# Altium PCB PowerMeter.PcbDoc
Units mm, origin at the board's own origin, x right, y up, seen from the top; angles counter-clockwise.
Board outline 98.93 x 50.29 mm, 2 copper layers (Top Layer, Bottom Layer); 55 components, 37 nets, 172 pads, 0 vias.
Unrouted connection lines stored in the file: 2.
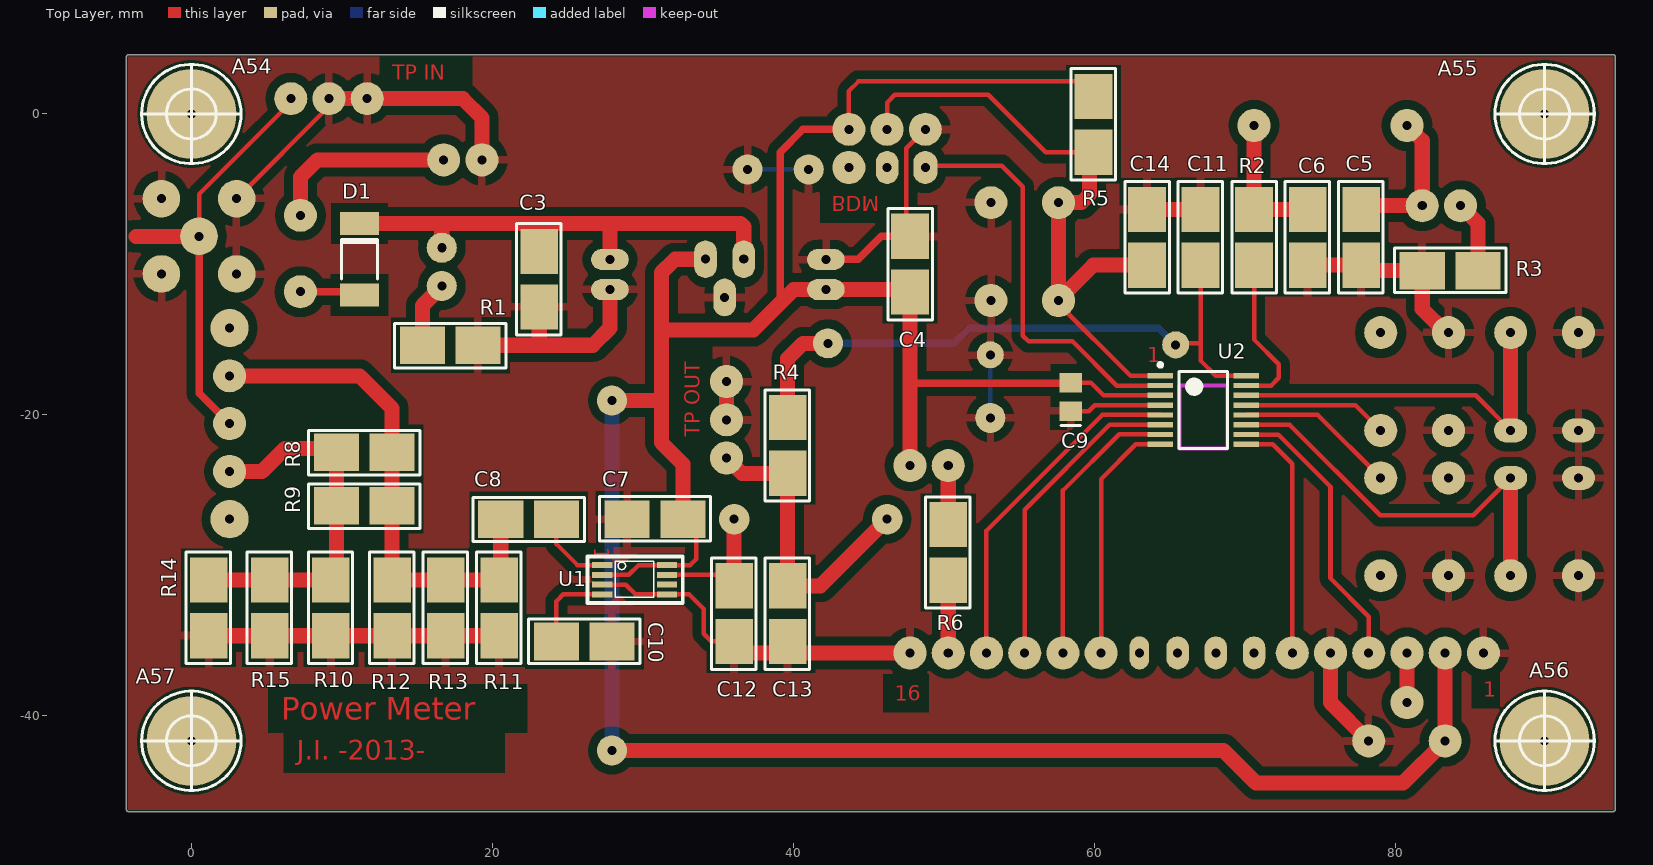
[diagram p0: Top Layer view]
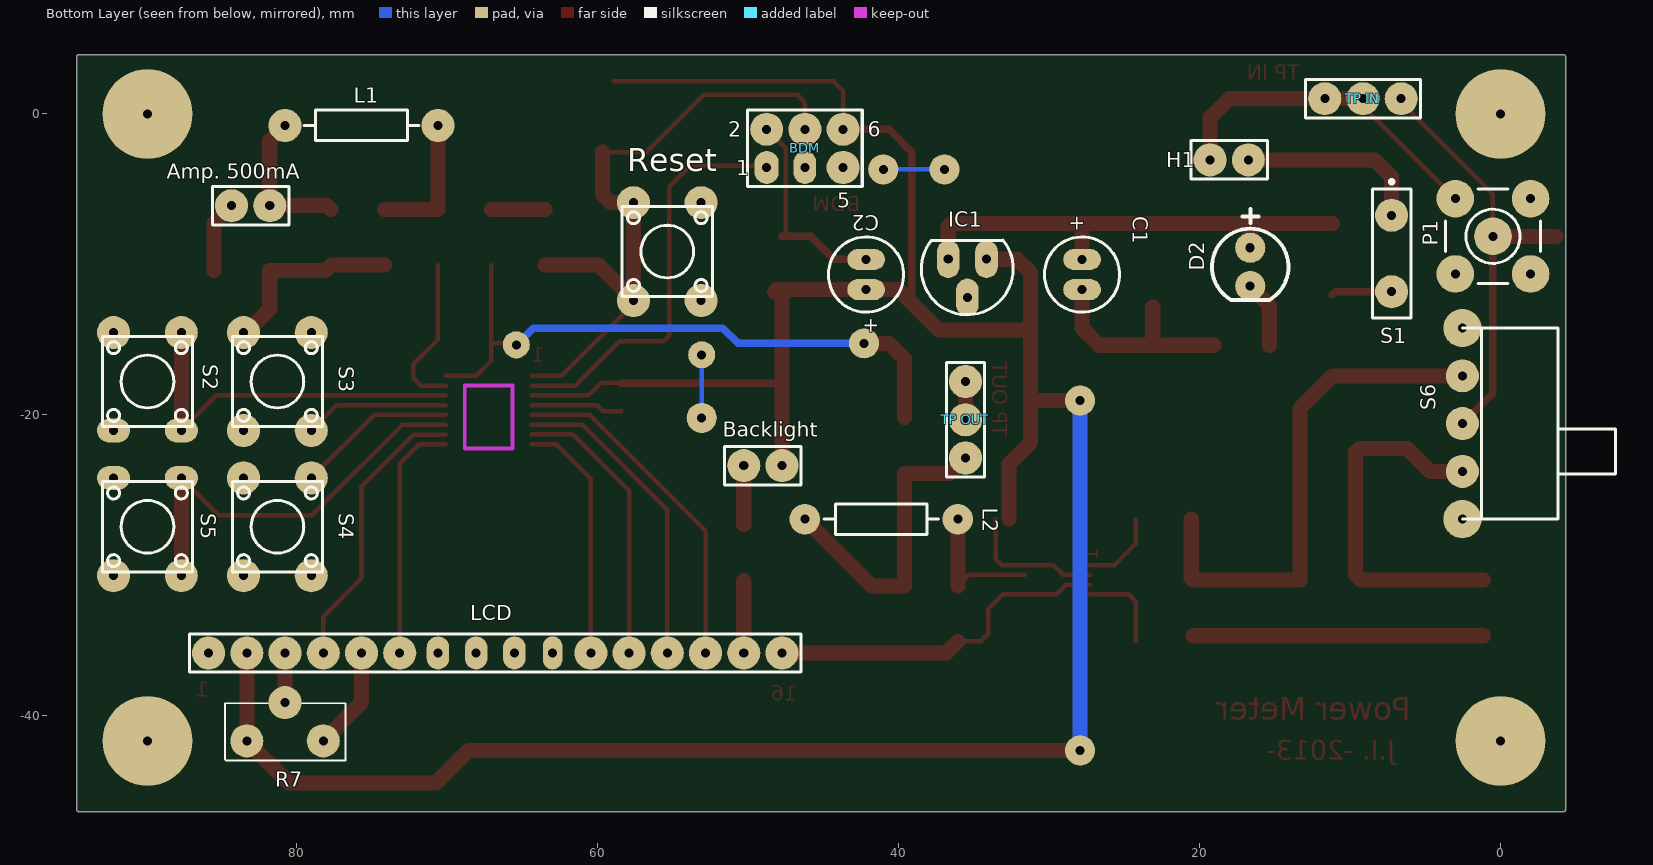
[diagram p1: Bottom Layer view, seen from below]
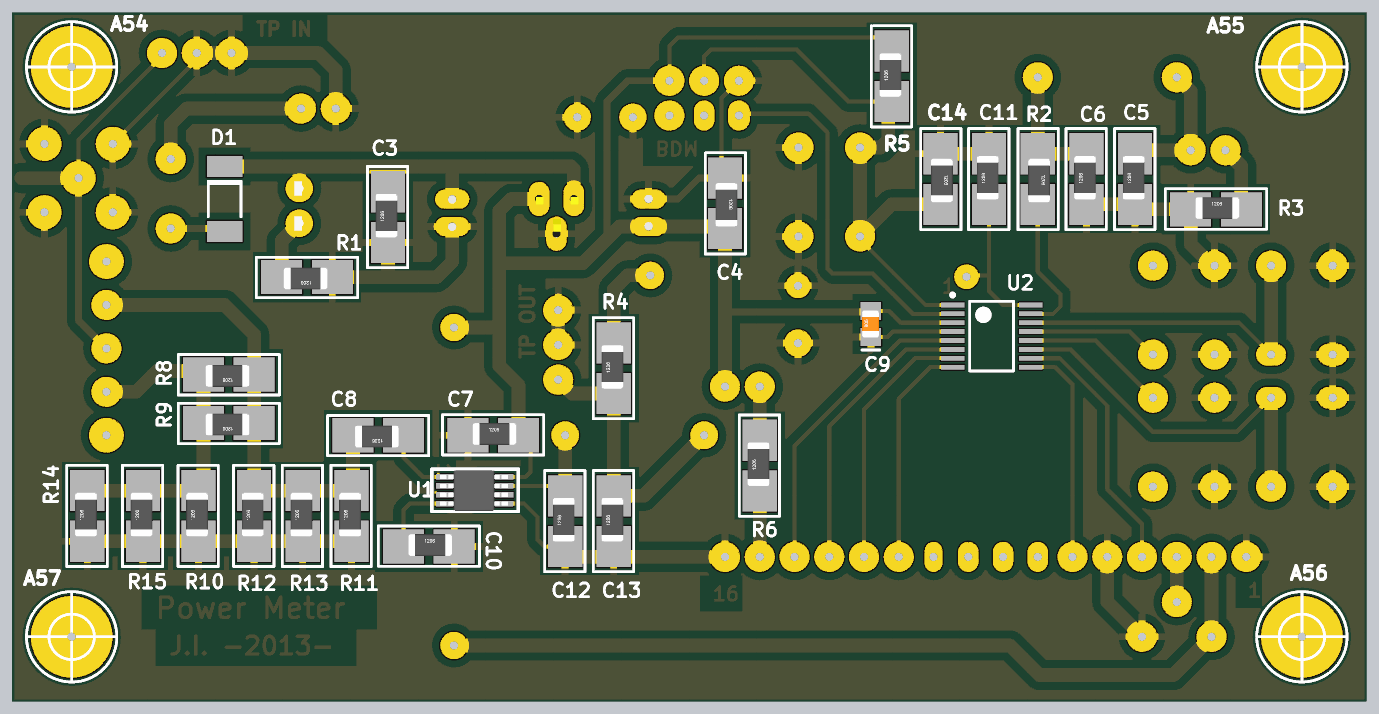
[diagram p2: 3D render of the assembled board from above, using the file's embedded part models]

## Layer stack, top to bottom
Top Solder: solder mask 0.0102, Solder Resist, Dk 3.5
Top Layer: signal copper 0.0356
Dielectric1: dielectric 0.32, FR-4, Dk 4.8
Bottom Layer: signal copper 0.0356
Bottom Solder: solder mask 0.0102, Solder Resist, Dk 3.5

## Board outline
-4.317,-46.209 cw(c-4.191,-46.19) -4.318,-46.19 -4.318,3.81 cw(c-4.191,3.81) -4.191,3.937 94.488,3.937 cw(c94.488,3.81) 94.615,3.81 94.615,-46.228 cw(c94.488,-46.228) 94.488,-46.355 -4.191,-46.355 cw(c-4.191,-46.228)

## Design rules (kind name [scope] priority, off if disabled: settings)
Clearance Clearance_2 [(InComponent('U1' )) Or (InComponent('U2'))] p1: gap=0.1
Clearance Clearance_1 [InNamedPolygon('PlanoGND')] p2: gap=0.6
Clearance [All] p3: gap=0.254
MinimumSolderMaskSliver [All] p1: minsoldermaskwidth=0.04
NetAntennae [Not (InNet('NetP1_1'))] p1: netantennaetolerance=0
PolygonConnect [All] p1: connectstyle=Relief reliefconductorwidth=0.5 reliefentries=4 polygonreliefangle="90 Angle" airgapwidth=0.254
RoomDefinition Micro [InComponentClass('Micro')] p1: confinementstyle=ConfineIn formatcopy=TRUE lockcomponents=FALSE outline 39.624,-44.45 93.726,-44.45 93.726,3.429 39.624,3.429
RoomDefinition Fuente [InComponentClass('Fuente')] p2: confinementstyle=ConfineIn formatcopy=TRUE lockcomponents=FALSE outline 5.588,-17.272 49.911,-17.272 49.911,-1.397 5.588,-1.397
RoomDefinition Detector [InComponentClass('Detector')] p3: confinementstyle=ConfineIn formatcopy=TRUE lockcomponents=FALSE outline -8.128,-37.973 48.514,-37.973 48.514,3.937 -8.128,3.937
RoutingVias [All] p1: holewidth=0.711 width=1.27 viastyle="Through Hole" minholewidth=0.711 minwidth=1.27 maxholewidth=0.711 maxwidth=1.27
SilkToSilkClearance [All] p1: silktosilkclearance=0.1
SilkToSolderMaskClearance SilkscreenOverComponentPads [IsPad] p1: minsilkscreentomaskgap=0 clearancetoexposedcopper=TRUE
SolderMaskExpansion [All] p1: expansion=0.102
UnRoutedNet UnRoutedNet_1 [Not((InNet('NetS2_1') OR InNet('NetS3_1') OR InNet('NetS4_1') OR InNet('NetS5_1')))] p1:
Width [All] p1: maxlimit=1 minlimit=0.3 preferedwidth=0.5
24 further rules are at their usual default settings.

## Classes and differential pairs
component class Micro: "Amp. 500mA" Backlight BDM C5 C6 C9 C11 C14 L1 LCD R2 R3 R5 R6 R7 Reset S2 S3 S4 S5 U2
component class Fuente: C1 C2 C3 C4 D1 D2 H1 IC1 R1 S1
component class Detector: C7 C8 C10 C12 C13 L2 P1 R4 R8 R9 R10 R11 R12 R13 R14 R15 S6 "TP IN" "TP OUT" U1
component class PowerMeter: "Amp. 500mA" Backlight BDM C1 C2 C3 C4 C5 C6 C7 C8 C9 C10 C11 C12 C13 C14 D1 D2 H1 IC1 L1 L2 LCD P1 R1 R2 R3 R4 R5 R6 R7 R8 R9 R10 R11 R12 R13 R14 R15 Reset S1 S2 S3 S4 S5 S6 "TP IN" "TP OUT" U1 U2

## Components (designator, comment, footprint, x,y, rotation, side; value= is the part's Value field where it differs from the comment)
A54 "Comment" "AGUJERO 1/8\"" 0,0 r0 top
A55 "Comment" "AGUJERO 1/8\"" 89.916,0 r0 top
A56 "Comment" "AGUJERO 1/8\"" 89.916,-41.656 r0 top
A57 "Comment" "AGUJERO 1/8\"" 0,-41.656 r0 top
"Amp. 500mA" "Header 2" HDR1X2 81.788,-6.096 r0 bottom
Backlight "Header 2" HDR1X2 47.752,-23.368 r0 bottom
BDM "BKDM_Conn." HDR2X3 48.768,-3.556 r180 bottom (schematic designator J1)
C1 "Cap Pol1" CAPPR2-5x11 27.813,-10.668 r270 bottom
C2 "Cap Pol1" CAPPR2-5x11 42.164,-10.668 r90 bottom
C3 "" "SMD generico" 23.114,-12.827 r90 top
C4 "" "SMD generico" 47.752,-8.128 r270 top
C5 "Capacitor" "SMD Generico" 77.724,-10.05 r90 top
C6 "Capacitor" "SMD Generico" 74.168,-10.05 r90 top
C7 "Capacitor" "SMD Generico" 28.956,-26.924 r0 top
C8 "Capacitor" "SMD Generico" 24.257,-26.924 r180 top
C9 "Capacitor" CAP-0805 58.42,-18.796 r90 top
C10 "Capacitor" "SMD Generico" 24.257,-35.052 r0 top
C11 "Capacitor" "SMD Generico" 67.056,-10.05 r90 top
C12 "Capacitor" "SMD Generico" 36.068,-35.052 r90 top
C13 "Capacitor" "SMD Generico" 39.624,-35.052 r90 top
C14 "Capacitor" "SMD Generico" 63.5,-6.35 r270 top
D1 "1N400X" MELF 11.176,-9.652 r90 top
D2 "LED Verde" LED 16.637,-8.89 r270 bottom
H1 "Header 2" HDR1X2 19.304,-3.048 r180 bottom
IC1 "78Lxx" "TO-92 (2)" 35.433,-9.652 r90 bottom
L1 "choke" axial-0.4 75.692,-0.762 r0 bottom
L2 "choke" AXIAL-0.4 41.148,-26.924 r0 bottom
LCD "Header 16" HDR1X16 85.852,-35.814 r180 bottom (schematic designator LED)
P1 "SMA" SMB_V-RJ45 0.508,-8.128 r180 bottom
R1 "" "SMD generico" 19.05,-15.367 r180 top
R2 "Resistor" "SMD generico" 70.612,-6.35 r270 top
R3 "Resistor" "smd generico" 81.788,-10.414 r0 top
R4 "Resistor" "SMD GENERICO" 39.624,-23.876 r90 top
R5 "Resistor" "smd generico" 59.944,-2.54 r90 top
R6 "Resistor" "SMD generico" 50.292,-30.988 r90 top
R7 "Potenciómetro" "TRIMMER-V (2)" 83.312,-41.656 r180 bottom
R8 "Resistor" "SMD generico" 13.335,-22.479 r180 top
R9 "Resistor" "SMD generico" 13.335,-26.035 r180 top
R10 "Resistor" "SMD generico" 9.271,-34.671 r90 top
R11 "Resistor" "SMD generico" 20.447,-34.671 r90 top
R12 "Resistor" "SMD generico" 13.335,-34.671 r90 top
R13 "Resistor" "SMD generico" 16.891,-34.671 r90 top
R14 "Resistor" "SMD generico" 1.143,-34.671 r90 top
R15 "Resistor" "SMD generico" 5.207,-34.671 r90 top
Reset "SW-DPST" SW-T-V-6x6#1 55.372,-9.144 r90 bottom
S1 "SW-SPST" SPST-2 7.239,-9.271 r270 bottom
S2 "SW-DPST" SW-T-V-6x6#2 89.916,-17.78 r270 bottom
S3 "SW-DPST" SW-T-V-6x6#1 81.28,-17.78 r270 bottom
S4 "SW-DPST" SW-T-V-6x6#1 81.28,-27.432 r270 bottom
S5 "SW-DPST" SW-T-V-6x6#3 89.916,-27.432 r270 bottom
S6 "SW-SPDT" SW-SPDT-H 2.54,-26.924 r90 bottom
"TP IN" "Header 3" HDR1X3 11.684,1.016 r180 bottom
"TP OUT" "Header 3" HDR1X3 35.56,-17.78 r270 bottom
U1 "MAX9933" "8L uMAX" 27.305,-29.972 r0 top
U2 "MC9S08SH8" TSSOP16 64.389,-17.399 r0 top

## Footprints (in the part's own frame and the unit in brackets; to place one, negate y for a bottom-side part, rotate by r counter-clockwise, add the part's x,y. Pads: shape width x height; smd on the part's side, far side on the other; paste and mask are expansions set on the pad)
"8L uMAX" [mm] "8 PIN SMD PACKAGE for MAX9933"
  rect 1.35x0.4 smd: 1(0,0) 2(0,-0.65) 3(0,-1.3) 4(0,-1.95) 5(4.3,-1.95) 6(4.3,-1.3) 7(4.3,-0.65) 8(4.3,0)
  silkscreen extent -0.97,-2.52 5.35,0.58, body extent -0.4,-2.47 4.6,0.53, height 0.95
"AGUJERO 1/8\"" [mil] "Agujero pasante para tornillo de 1/8\" de diámetro"
  round 235 hole 23.62: 1(0,0)
  silkscreen extent -130,-130 130,130
axial-0.4 [mm] "Componente de 2 pines axiales, Pitch: 400mil (10.16mm)"
  round 2.2 hole 0.6: 1(-5.08,0) 2(5.08,0)
  silkscreen extent -3.81,-1.02 3.81,1.02
AXIAL-0.4 [mil] "Componente de 2 pines axiales, Pitch: 400mil (10.16mm)"
  round 80 hole 23.62: 1(-200,0) 2(200,0)
  silkscreen extent -150,-40 150,40
CAP-0805 [mm] "Chip Capacitor; Body 2.0 x 1.2 mm (LxW typ)"
  rect 1.3x1.5 smd: 1(-0.95,0) 2(0.95,0)
  silkscreen extent -1.9,-0.65 -1.9,0.65, body extent -1,-0.6 1,0.65, height 0.78
CAPPR2-5x11 [mm] "Capacitor, Electrolytic, Radial; Body 5 x 11 mm (Dia.xH typ); Pin Spacing 2 mm (typ)"
  oval 1.4x2.5 hole 0.6: 1(-1,0) 2(1,0)
  silkscreen extent -2.5,-2.5 2.5,2.5, body extent -2.5,-2.53 2.55,2.53, height 11.53
HDR1X2 [mm] "Connector; Header; 2 Position"
  round 2.2 hole 0.6: 1(0,0) 2(2.54,0)
  silkscreen extent -1.27,-1.27 3.81,1.27
HDR1X3 [mm] "Connector; Header; 3 Position"
  round 2.2 hole 0.6: 1(0,0) 2(2.54,0) 3(5.08,0)
  silkscreen extent -1.27,-1.27 6.35,1.27
HDR1X16 [mm] "Connector; Header; 16 Position"
  round 2.2 hole 0.6: 1(0,0) 2(2.54,0) 3(5.08,0) 4(7.62,0) 5(10.16,0) 6(12.7,0) 11(25.4,0) 12(27.94,0) 13(30.48,0) 14(33.02,0) 15(35.56,0) 16(38.1,0)
  oval 1.5x2.2 hole 0.6: 7(15.24,0) 8(17.78,0) 9(20.32,0)
  oval 1.3x2.2 hole 0.6: 10(22.86,0)
  silkscreen extent -1.27,-1.27 39.37,1.27
HDR2X3 [mm] "Connector; Header; 3x2 Position"
  oval 1.6x2.2 hole 0.6: 1(0,0)
  round 2.2 hole 0.6: 2(0,2.54) 4(2.54,2.54) 5(5.08,0) 6(5.08,2.54)
  oval 1.5x2.2 hole 0.6: 3(2.54,0)
  silkscreen extent -1.27,-1.27 6.35,3.81
LED [mm]
  round 2 hole 0.6: 1(0,0) 2(2.54,0)
  silkscreen extent -2.59,-2.54 3.47,2.54, body extent -1.7,-2.91 3.72,3.11, height 8.81
MELF [mm] "Metal Electrode Face (MELF) Diode; Body 5 x 2.5 mm (LxDia)"
  rect 1.55x2.6 smd: 1(-2.375,0) 2(2.375,0)
  silkscreen extent -1.3,-1.2 1.3,1.2
SMB_V-RJ45 [mm] "Connector; SMB Straight"
  round 2.5 hole 0.6: 1(0,0) 2(-2.5,-2.5) 2(-2.5,2.5) 2(2.5,-2.5) 2(2.5,2.5)
  silkscreen extent -3.15,-3.15 3.15,3.15
"SMD generico" [mm] "SMD 0805-1206-1210"
  rect 3x2.5 smd: 1(0,0) 2(3.7,0)
  silkscreen extent -1.85,-1.45 5.55,1.5, body extent 0.35,-0.7 3.55,0.9, height 1
"SMD Generico" [mm] "SMD 0805-1206-1210"
  rect 3x2.5 smd: 1(0,0) 2(3.7,0)
  silkscreen extent -1.85,-1.45 5.55,1.5, body extent 0.35,-0.7 3.55,0.9, height 1
"smd generico" [mm] "SMD 0805-1206-1210"
  rect 3x2.5 smd: 1(0,0) 2(3.7,0)
  silkscreen extent -1.85,-1.45 5.55,1.5, body extent 0.35,-0.7 3.55,0.9, height 1
"SMD GENERICO" [mm] "SMD 0805-1206-1210"
  rect 3x2.5 smd: 1(0,0) 2(3.7,0)
  silkscreen extent -1.85,-1.45 5.55,1.5, body extent 0.35,-0.7 3.55,0.9, height 1
SPST-2 [mm] "Circuit Breaker; 2 Leads"
  round 2.2 hole 0.6: 1(-2.54,0) 2(2.54,0)
  silkscreen extent -4.89,-1.27 4.28,1.27
SW-SPDT-H [mm] "Interruptor un polo y dos posiciones para circuito impreso, posición horizontal, Pitch: 125mil (3.174mm)"
  round 2.54 hole 0.6: 0(0,0) 0(12.7,0)
  round 2.2 hole 0.6: 1(6.35,0) 2(9.525,0) 3(3.175,0)
  silkscreen extent 0,-10.16 12.7,0
SW-T-V-6x6#1 [mm] "Pulsador tactil vertical para circuito impreso, Dimensiones: 6 x 6 mm"
  round 2.2 hole 0.6: 1(-3.25,2.25) 1(3.25,2.25) 2(-3.25,-2.25) 2(3.25,-2.25)
  silkscreen extent -3,-3 3,3
SW-T-V-6x6#2 [mm] "Pulsador tactil vertical para circuito impreso, Dimensiones: 6 x 6 mm"
  round 2.2 hole 0.6: 1(-3.25,2.25) 2(-3.25,-2.25)
  oval 1.6x2.2 hole 0.6: 1(3.25,2.25) 2(3.25,-2.25)
  silkscreen extent -3,-3 3,3
SW-T-V-6x6#3 [mm] "Pulsador tactil vertical para circuito impreso, Dimensiones: 6 x 6 mm"
  oval 1.6x2.2 hole 0.6: 1(-3.25,2.25) 2(-3.25,-2.25)
  round 2.2 hole 0.6: 1(3.25,2.25) 2(3.25,-2.25)
  silkscreen extent -3,-3 3,3
"TO-92 (2)" [mm] "TO, 3 pines axiales en triangulo, Diametro del cuerpo: 180mil (4.58mm), Pitch: 50mil (1.27mm)"
  oval 2.5x1.5 hole 0.6 paste+0: 1(0,-1.27) 2(-2.54,0) 3(0,1.27)
  silkscreen extent -3.69,-3.04 1.27,3.06, body extent -2.8,-2.61 1.36,2.71, height 7.33
"TRIMMER-V (2)" [mm] "trimer vertical- 200 mils separación horizonal- 100 mils de separación vertical"
  round 2.2 hole 0.6: 1(0,0) 2(2.54,2.54) 3(5.08,0)
  silkscreen extent -1.45,-1.3 6.55,2.5
TSSOP16 [mm] "-"
  rect 1.7x0.35 smd: 1(0,0) 2(0,-0.65) 3(0,-1.3) 4(0,-1.95) 5(0,-2.6) 6(0,-3.25) 7(0,-3.9) 8(0,-4.55) 9(5.7,-4.55) 10(5.7,-3.9) 11(5.7,-3.25) 12(5.7,-2.6) 13(5.7,-1.95) 14(5.7,-1.3) 15(5.7,-0.65) 16(5.7,0)
  silkscreen extent -0.12,-4.82 4.45,0.85, body extent 0.6,-4.83 5.1,0.27, height 1.1

## Part data
"Amp. 500mA" Backlight H1: "Header, 2-Pin"
C1 C2: "Polarized Capacitor (Radial)"
C3 C4: library part Cap, "Capacitor"
C5 C6 C7 C8 C9 C10 C11 C12 C13 C14: "Capacitor no polarizado"
D1: library part Diode, "Default Diode"
D2: library part LED0, "Typical INFRARED GaAs LED"
IC1: "Regulador fijo de tensión positiva 100mA"
L1 L2: library part Inductor, "Inductor"
LCD: "Header, 16-Pin"
P1: library part SMB, "SMB Straight Connector"
R1: library part Res1, "Resistor"
Reset S2 S3 S4 S5: "Double-Pole, Single-Throw Switch"
S1: "Single-Pole, Single-Throw Switch"
S6: "SPDT Subminiature Toggle Switch, Right Angle Mounting, Vertical Actuation"
"TP IN" "TP OUT": "Header, 3-Pin"
U1: "RF LOG DETECTOR"
U2: "Microcontrolador"

## Free pads (board coordinates)
  round 2 hole 0.6: 0(27.94,-19.05) 1(27.94,-42.291) 2(41.021,-3.683) 3(36.957,-3.683) 3(42.291,-15.24) 7(53.086,-20.193)
  round 1.8 hole 0.6: 1(65.405,-15.34) 5(53.086,-16.002)

## Nets (pads, with @x,y where several pads share a name; then routed paths per layer and width w, separated by ;. In a path a pad name is that pad's centre, name@x,y a point inside that pad or via, vN(x,y) a via of type N, cw(c..) or ccw(c..) an arc to the next point about the centre after c; other vN are vias at no path point)
A: LCD.15 R6.1 | length 4.8
  Top Layer w1: LCD.15 R6.1
BKGD: BDM.1 U2.2 | length 27.8
  Top Layer w0.3: BDM.1@48.768,-2.667 49.53,-3.429 53.848,-3.429 55.245,-4.826 55.245,-14.732 55.626,-15.113 58.547,-15.113 61.483,-18.049 U2.2
D0: LCD.7
D1: LCD.8
D2: LCD.9
D3: LCD.10
D4: LCD.11 U2.8 | length 16.5
  Top Layer w0.3: LCD.11 60.452,-24.257 62.76,-21.949 U2.8
D5: LCD.12 U2.7 | length 18.8
  Top Layer w0.3: LCD.12 57.912,-25.019 61.657,-21.274 64.364,-21.274 U2.7
D6: LCD.13 U2.6 | length 20.9
  Top Layer w0.3: LCD.13 55.372,-26.289 61.012,-20.649 U2.6
D7: LCD.14 U2.5 | length 22.9
  Top Layer w0.3: LCD.14 52.832,-27.686 60.519,-19.999 U2.5
E: LCD.6 U2.9 | length 16.2
  Top Layer w0.3: U2.9 71.86,-21.949 73.152,-23.241 LCD.6
GND: "TP IN.1" "TP IN.2" "TP OUT.1" "TP OUT.2" BDM.2 C1.2 C2.2 C3.1 C4.1 C5.1 C6.1 C7.1 C9.1 C10.2 C11.2 C12.1 C13.1 C14.1 H1.1 IC1.2 LCD.1 LCD.5 LCD.16 P1.2 pad.2 pad.3@36.957,-3.683 pad.5 pad.7 R1.1 R3.1 R7.3 R10.1 R11.1 R12.1 R13.1 R14.1 R15.1 Reset.2 S2.2 S3.2 S4.2 S5.2 U1.3 U1.5 U2.4 | length 134.4
  Top Layer w0.3: P1.2@3.008,-5.628 9.144,0.508 9.144,1.016 ; U1.3 28.859,-31.272 29.509,-31.922 U1.5 33.065,-31.922 34.036,-32.893 34.036,-34.544 34.544,-35.052 C12.1 ; C4.1@47.498,-8.128 47.498,-2.286 BDM.2 ; C4.1@47.625,-8.001 C4.1 ; BDM.2@48.323,-0.572 BDM.2@48.768,-0.127 ; C9.1 59.629,-19.746 60.026,-19.349 U2.4
  Top Layer w0.5: C2.2 44.307,-9.668 45.847,-8.128 47.498,-8.128 C4.1
  Top Layer w1: R14.1 R15.1 R10.1 R12.1 R13.1 R11.1 ; 9.144,1.016 11.684,1.016 18.034,1.016 19.304,-0.254 H1.1 ; R1.1 26.67,-15.367 27.813,-14.224 C1.2 ; 23.114,-15.24 C3.1 ; 35.433,-17.653 35.56,-17.78 35.56,-20.32 ; C12.1 36.83,-35.814 LCD.16 ; C14.1 C11.2 ; C6.1 C5.1 78.088,-10.414 R3.1 81.788,-12.954 83.364,-14.53 S3.2@83.53,-14.53 ; LCD.5 75.692,-39.116 R7.3
  Bottom Layer w0.3: pad.3@36.957,-3.683 pad.2 ; pad.7 pad.5
"NetAmp. 500mA_1": "Amp. 500mA.1" C5.2 L1.2 | length 9.9
  Top Layer w1: C5.2 77.978,-6.096 81.788,-6.096 81.788,-1.778 L1.2
"NetAmp. 500mA_2": "Amp. 500mA.2" R3.2 | length 4.8
  Top Layer w1: 84.328,-6.096 85.488,-7.256 R3.2
NetBacklight_2: Backlight.2 R6.2 | length 3.9
  Top Layer w1: R6.2 Backlight.2
NetC1_1: C1.1 C3.2 D1.2 D2.1 IC1.3 | length 32
  Top Layer w1: D1.2 16.51,-7.277 ; D2.1 16.637,-7.404 16.51,-7.277 ; C1.1@27.94,-9.541 C1.1 27.813,-7.277 ; IC1.3 36.703,-7.493 36.487,-7.277 27.813,-7.277 ; 16.51,-7.277 27.813,-7.277
NetC6_2: C6.2 L1.1 R2.1 | length 9.1
  Top Layer w1: L1.1 R2.1 C6.2
NetC8_1: C8.1 U1.1 | length 5.3
  Top Layer w0.3: C8.1 24.257,-28.575 25.654,-29.972 U1.1
NetC8_2: C8.2 R8.1 R9.1 R11.2 R12.2 R13.2 S6.2 | length 34.3
  Top Layer w1: S6.2 11.176,-17.399 13.335,-19.558 R8.1 R9.1 R12.2 R13.2 R11.2 20.557,-30.861 C8.2
NetC10_1: C10.1 U1.4 | length 5.9
  Top Layer w0.3: C10.1 24.257,-32.385 24.72,-31.922 U1.4
NetC12_2: C12.2 L2.1 U1.7 | length 9.2
  Top Layer w0.3: U1.7 35.338,-30.622 C12.2
  Top Layer w1: C12.2 L2.1
NetC13_2: "TP OUT.3" C13.2 L2.2 R4.1 | length 20.4
  Top Layer w1: 35.56,-22.86 36.576,-23.876 R4.1 C13.2 41.8,-31.352 L2.2
NetD1_1: D1.1 S1.2 | length 4
  Top Layer w0.5: S1.2 10.96,-11.811 D1.1
NetD2_2: D2.2 R1.2 | length 4.5
  Top Layer w1: R1.2 15.35,-12.717 D2.2
NetH1_2: H1.2 S1.1 | length 12.5
  Top Layer w1: S1.1 7.239,-4.191 8.382,-3.048 H1.2
NetP1_1: "TP IN.3" P1.1 S6.1 | length 29.1
  Top Layer w0.3: P1.1 0.508,-5.334 6.604,0.762 6.604,1.016
  Top Layer w0.5: P1.1 0.508,-18.542 S6.1
  Top Layer w1: -3.683,-8.128 P1.1
NetR2_2: R2.2 U2.15 | length 10.6
  Top Layer w0.3: U2.15 71.74,-18.049 72.263,-17.526 72.263,-16.637 70.612,-14.986 R2.2
NetR8_2: R8.2 R9.2 R10.2 R14.2 R15.2 S6.3 | length 24.6
  Top Layer w1: R14.2 R15.2 R10.2 9.635,-30.607 R9.2 R8.2 9.381,-22.225 6.223,-22.225 4.699,-23.749 S6.3
NetS2_1: S2.1 U2.14 | length 25
  Top Layer w0.3: U2.14 85.335,-18.699 S2.1@87.666,-21.03
  Top Layer w1: S2.1@87.666,-21.03 S2.1@87.666,-14.53
NetS3_1: S3.1 U2.13 | length 9.6
  Top Layer w0.3: U2.13 77.349,-19.349 S3.1@79.03,-21.03
NetS4_1: S4.1 U2.12 | length 10.7
  Top Layer w0.3: U2.12 74.847,-19.999 S4.1@79.03,-24.182
NetS5_1: S5.1 U2.11 | length 27.6
  Top Layer w0.3: U2.11 72.973,-20.649 78.994,-26.67 85.178,-26.67 S5.1@87.666,-24.182
  Top Layer w1: S5.1@87.666,-30.682 S5.1@87.666,-24.182
RESET: BDM.4 C14.2 R5.1 Reset.1 U2.1 | length 46.2
  Top Layer w0.3: BDM.4 46.228,0.762 46.736,1.27 52.959,1.27 56.769,-2.54 59.69,-2.54 R5.1 ; Reset.1@56.979,-13.037 57.114,-13.037 57.578,-12.573 62.404,-17.399 U2.1
  Top Layer w1: Reset.1@57.114,-12.394 Reset.1@57.368,-12.14 ; Reset.1@57.114,-5.894 Reset.1@57.622,-5.894 ; R5.1@59.69,-2.54 59.69,-5.334 59.13,-5.894 Reset.1@57.622,-5.894 ; C14.2 59.927,-10.05 57.837,-12.14 Reset.1@57.368,-12.14 ; Reset.1@57.368,-12.14 57.622,-11.886 Reset.1@57.622,-5.894
RS: LCD.4 U2.10 | length 19.1
  Top Layer w0.3: U2.10 72.226,-21.299 75.692,-24.765 75.692,-30.861 78.232,-33.401 LCD.4
V0: LCD.3 R7.2 | length 3.3
  Top Layer w1: R7.2 LCD.3
VDD: Backlight.1 BDM.6 C2.1 C4.2 C7.2 C9.2 IC1.1 LCD.2 pad.0 pad.1@27.94,-42.291 R5.2 R7.1 U1.2 U1.8 U2.3 | length 201.1
  Top Layer w0.3: U1.2 29.068,-30.622 29.718,-29.972 U1.8 33.147,-29.972 33.545,-29.574 C7.2@33.545,-26.924 ; BDM.6 43.688,-0.127 43.688,1.524 44.323,2.159 R5.2@58.945,2.159 ; C9.2 59.756,-17.846 60.609,-18.699 U2.3
  Top Layer w0.5: 39.116,-12.573 39.116,-2.54 40.64,-1.016 42.799,-1.016 BDM.6@43.688,-0.127 ; 47.752,-17.907 C9.2@58.42,-17.907
  Top Layer w1: pad.1@27.94,-42.291 68.58,-42.291 70.739,-44.45 80.518,-44.45 R7.1 LCD.2 ; pad.0 31.115,-19.05 31.242,-18.923 ; C7.2 32.656,-23.258 31.242,-21.844 31.242,-18.923 ; 32.766,-9.652 IC1.1 32.131,-9.652 31.242,-10.541 31.242,-14.351 ; Backlight.1 47.752,-17.907 47.752,-16.002 ; 47.752,-15.875 C4.2 ; C4.2@48.26,-11.828 48.1,-11.668 C2.1 40.021,-11.668 39.116,-12.573 37.338,-14.351 31.242,-14.351 ; 31.242,-18.923 31.242,-14.351
  Bottom Layer w1: pad.1@27.94,-42.291 pad.0
VOUT: C11.1 pad.1@65.405,-15.34 pad.3@42.291,-15.24 R4.2 U2.16 | length 42.8
  Top Layer w0.3: pad.1@65.405,-15.24 67.056,-15.24 ; pad.1@65.659,-14.732 pad.1@65.836,-14.909 ; C11.1 67.056,-15.24 ; U2.16 68.072,-17.399 67.056,-16.383 67.056,-15.24
  Top Layer w1: R4.2 39.624,-16.256 40.64,-15.24 pad.3@42.291,-15.24
  Bottom Layer w0.3: pad.1@65.305,-14.605 pad.1@65.405,-14.705
  Bottom Layer w0.5: pad.3@42.291,-15.24 50.673,-15.24 51.689,-14.224 64.289,-14.224 pad.1@65.405,-15.34
pads on no net: A54.1 A55.1 A56.1 A57.1 BDM.3 BDM.5 S6.0 U1.6

## Polygon pours and split planes (outlines as drawn)
GND on Top Layer "PlanoGND" (solid, remove dead copper, pour order 2): -4.191,3.81 94.488,3.81 94.488,-46.228 -4.191,-46.228 -4.191,3.81

## Keep-outs
Keep-Out Layer:
  lines w0.254: 65.659,-22.225 65.659,-18.034 68.834,-18.034 68.834,-22.225 65.659,-22.225

## Other copper
Top Layer:
  text "1" at 63.5,-16.51 h1
  text "1" at 85.852,-38.735 h1
  text "16" at 46.736,-38.989 h1
  text "Power Meter" at 5.969,-40.259 h1.5
  text "J.I. -2013-" at 6.985,-42.926 h1.3

## Silkscreen, mask and mechanical layers (free items; w line width, h text height)
Mechanical 13:
  lines w0.254: -4.191,-46.228 94.488,-46.228 94.488,3.81 -4.191,3.81 -4.191,-46.19

## Text inside footprints (layer, text, board x,y; h text height)
BDM: Bottom Overlay "6" at 42.037,-1.524 h1; Bottom Overlay "5" at 44.069,-6.223 h1; Bottom Overlay "2" at 51.308,-1.524 h1; Bottom Overlay "1" at 50.8,-4.064 h1
C1: Bottom Overlay "+" at 28.563,-6.693 h1 r90
C2: Bottom Overlay "+" at 41.414,-14.643 h1 r270
U1: Top Layer "1" at 26.78,-28.797 h1 r270